# Altium PCB PCB1.PcbDoc
Units mm, origin at the board's own origin, x right, y up, seen from the top; angles counter-clockwise.
Board outline 51.97 x 50 mm, 2 copper layers (Top Layer, Bottom Layer); 61 components, 56 nets, 204 pads, 42 vias.
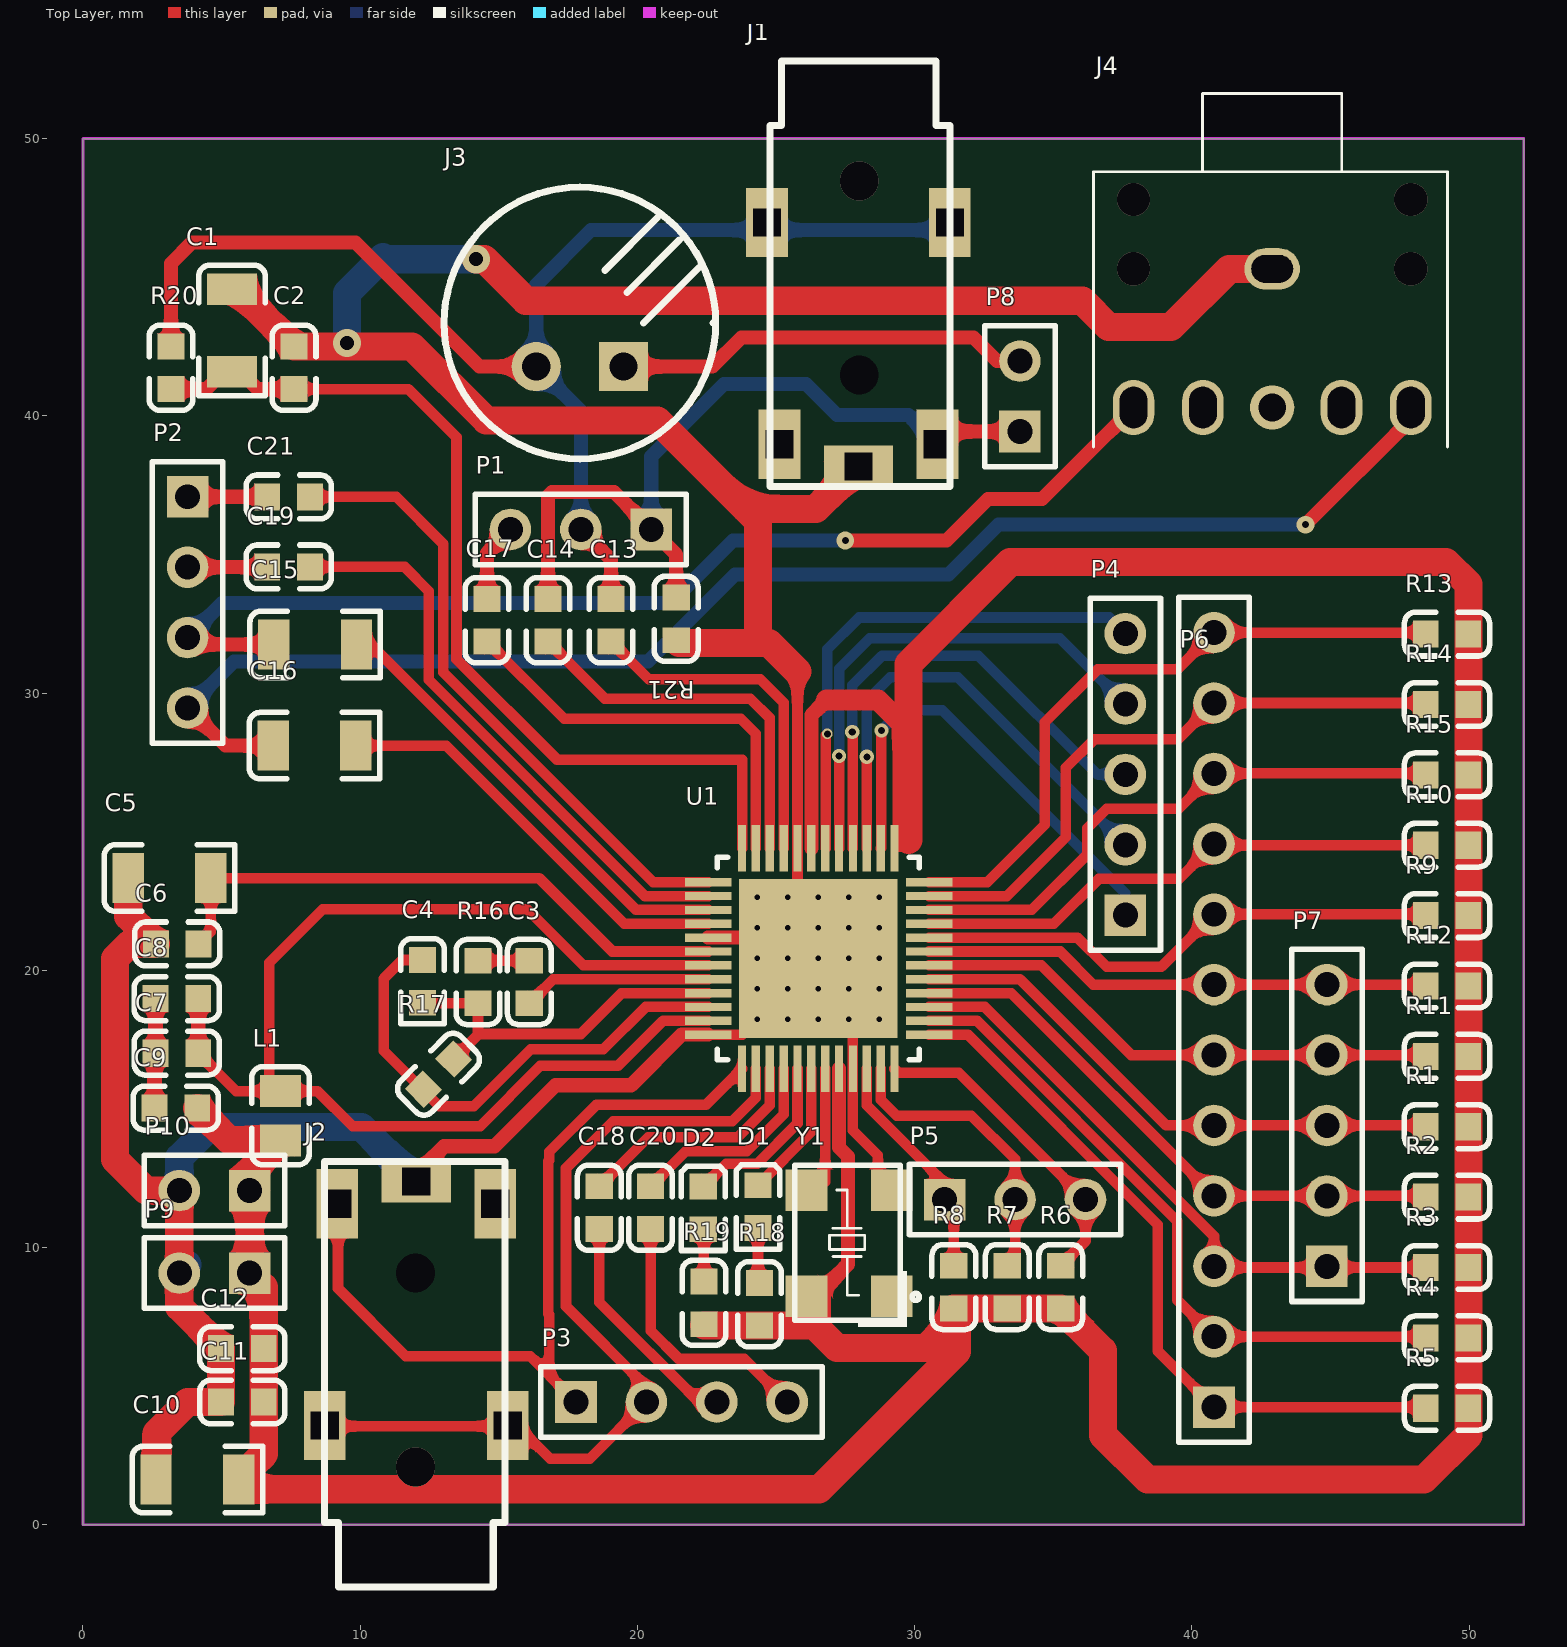
[diagram p0: Top Layer view]
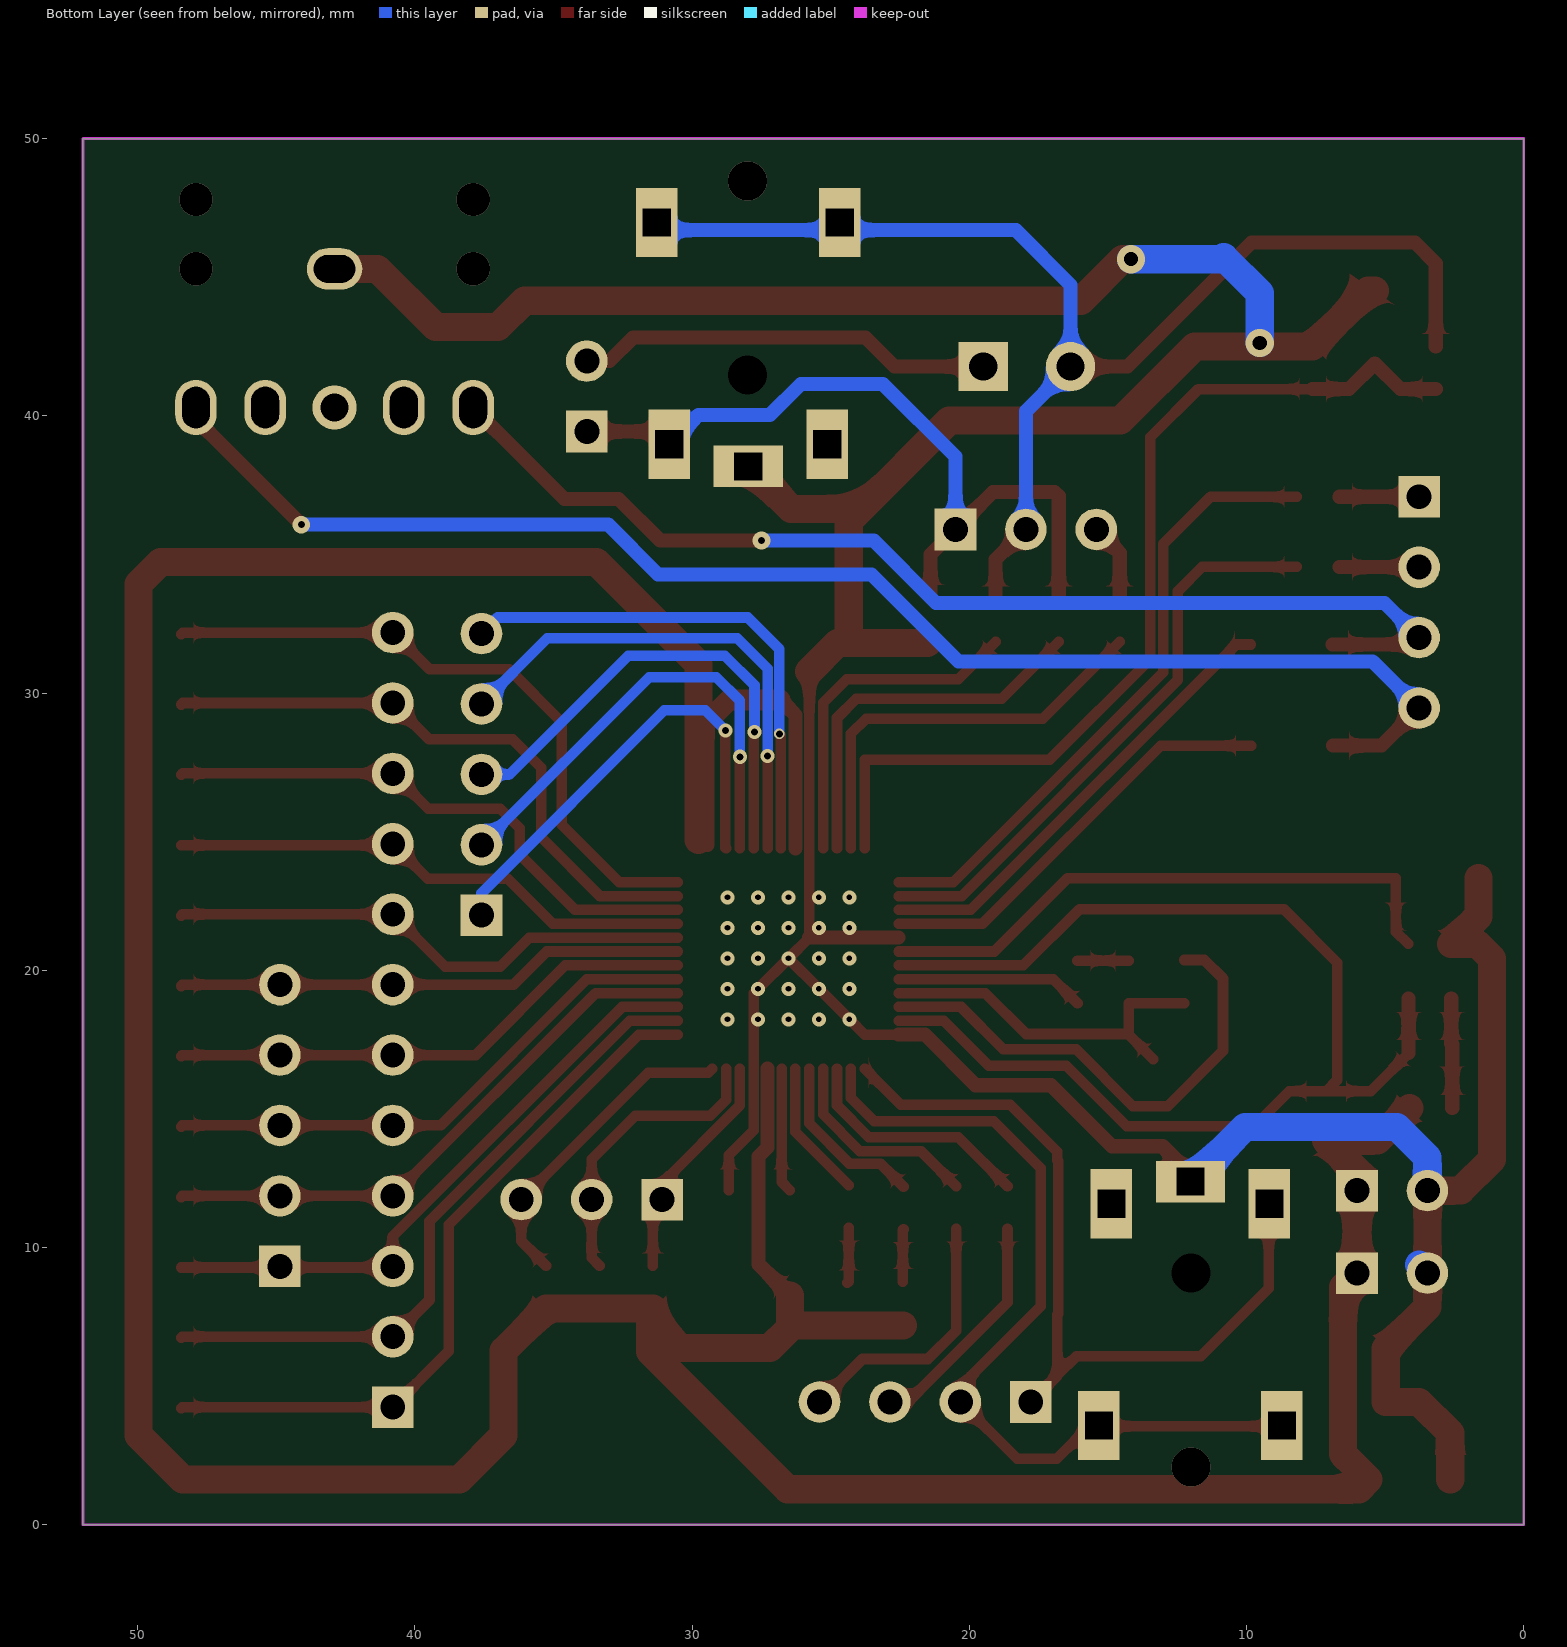
[diagram p1: Bottom Layer view, seen from below]
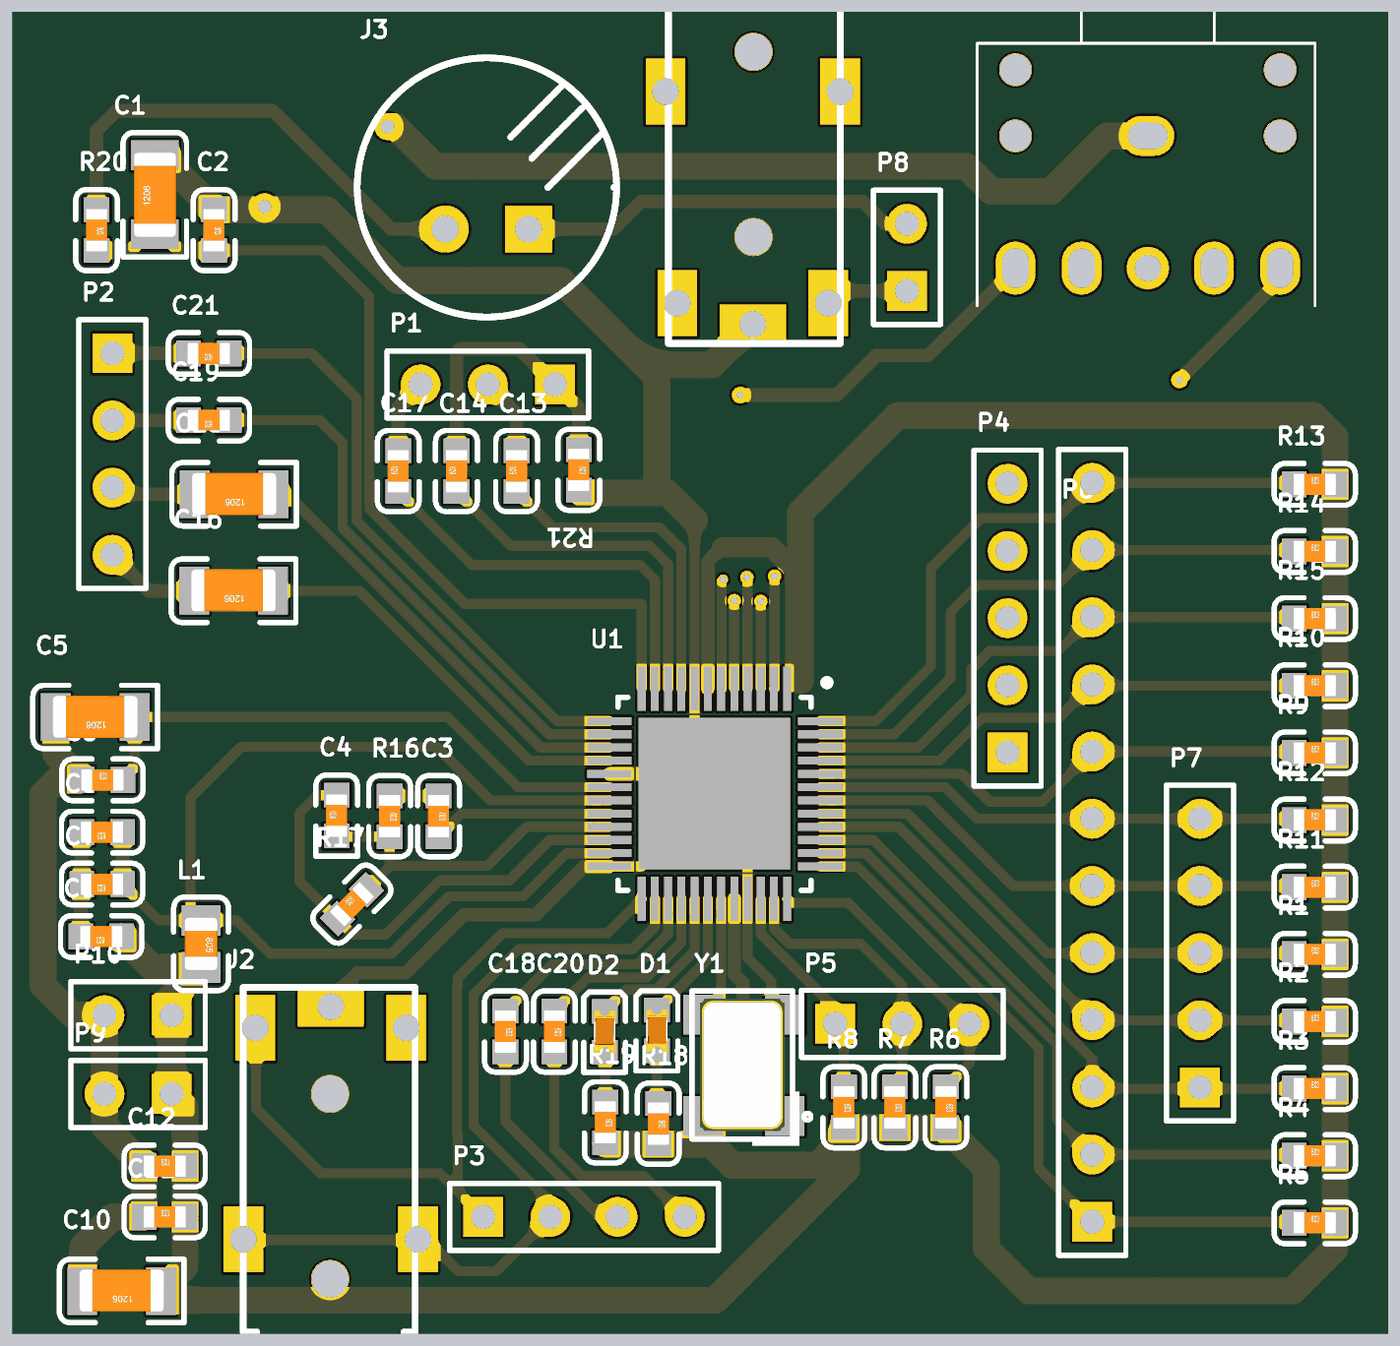
[diagram p2: 3D render of the assembled board from above, using the file's embedded part models]

## Layer stack, top to bottom
Top Solder: solder mask 0.0102, Solder Resist, Dk 3.5
Top Layer: signal copper 0.0356
Dielectric 1: dielectric 0.32, FR-4, Dk 4.8
Bottom Layer: signal copper 0.0356
Bottom Solder: solder mask 0.0102, Solder Resist, Dk 3.5

## Board outline
0,0 0,50 51.975,50 51.975,0

## Design rules (kind name [scope] priority, off if disabled: settings)
Clearance [All] p1 off: gap=0.254 ignorepadtopadclearanceinfootprint=FALSE except(0: Arc-Hole Track-Hole SMDPad-Hole THPad-Hole Via-Hole Fill-Hole Poly-Hole Region-Hole Text-Hole)
PolygonConnect [All] p1: connectstyle=Relief reliefconductorwidth=0.254 reliefentries=4 polygonreliefangle="90 Angle" airgapwidth=0.254
RoutingVias RoutingVias_power [InNetClass('power')] p1: holewidth=0.381 width=0.762 viastyle="Through Hole" minholewidth=0.381 minwidth=0.635 maxholewidth=0.508 maxwidth=1.016
RoutingVias [InNetClass('All Nets')] p2: holewidth=0.254 width=0.508 viastyle="Through Hole" minholewidth=0.254 minwidth=0.508 maxholewidth=0.254 maxwidth=0.635
SolderMaskExpansion [All] p1: expansion=0.102
Width Width_power [InNetClass('power')] p1: maxlimit=1.016 minlimit=0.381 preferedwidth=0.635
Width [All] p2: maxlimit=0.508 minlimit=0.381 preferedwidth=0.381
30 further rules are at their usual default settings.

## Classes and differential pairs
net class power: 3.3V GND

## Components (designator, comment, footprint, x,y, rotation, side; value= is the part's Value field where it differs from the comment)
C1 "Cap Pol1" 1206 5.375,43.075 r90 top value=10uF/16V
C2 "Cap" 0603 7.617,41.735 r270 top value=0.1uF
C3 "Cap" 0603 16.1,19.575 r270 top value=0.1uF
C4 "Cap" 0603 12.25,19.6 r90 top value=220pF
C5 "Cap Pol1" 1206 3.125,23.325 r180 top value=10uF/16V
C6 "Cap" 0603 3.4,20.95 r0 top value=0.1uF
C7 "Cap" 0603 3.386,17.008 r180 top value=0.1uF
C8 "Cap" 0603 3.386,18.975 r180 top value=0.1uF
C9 "Cap" 0603 3.35,15.025 r180 top value=0.1uF
C10 "Cap Pol1" 1206 4.125,1.625 r180 top value=10uF/16V
C11 "Cap" 0603 5.75,4.425 r0 top value=0.1uF
C12 "Cap" 0603 5.75,6.35 r0 top value=0.1uF
C13 "Cap" 0603 19.05,32.625 r90 top value=1uF
C14 "Cap" 0603 16.775,32.625 r90 top value=1uF
C15 "Cap Pol1" 1206 8.375,31.75 r180 top value=10uF/16V
C16 "Cap Pol1" 1206 8.35,28.1 r180 top value=10uF/16V
C17 "Cap" 0603 14.575,32.625 r90 top value=1uF
C18 "Cap" 0603 18.625,11.435 r270 top value=1uF
C19 "Cap" 0603 7.421,34.55 r180 top value=1uF
C20 "Cap" 0603 20.475,11.435 r270 top value=1uF
C21 "Cap" 0603 7.421,37.075 r180 top value=1uF
D1 "LED2" 0603-LED 24.35,11.475 r270 top
D2 "LED2" 0603-LED 22.375,11.425 r270 top
J1 "PJ_322" PJ_322 28,50.475 r270 top
J2 "PJ_322" PJ_322 12,0.075 r90 top
J3 "Mic2" 9*7mic 17.925,43.35 r0 top
J4 "3.5-StereoSocket" 3F07 42.9,40.3 r270 top
L1 "Inductor" 0805 7.125,14.75 r270 top value=47uH
P1 "Header 3" HDR1X3 20.5,35.9 r180 top
P2 "Header 4" HDR1X4 3.775,37.08 r270 top
P3 "Header 4" HDR1X4 17.785,4.425 r0 top
P4 "Header 5" HDR1X5 37.6,21.985 r90 top
P5 "Header 3" HDR1X3 31.085,11.725 r0 top
P6 "Header 12" HDR1X12 40.8,4.24 r90 top
P7 "Header 5" HDR1X5 44.87,9.32 r90 top
P8 "Header 2" HDR1X2 33.8,39.435 r90 top
P9 "Header 2" HDR1X2 6.015,9.075 r180 top
P10 "Header 2" HDR1X2 6.015,12.05 r180 top
R1 "Res1" 0603 49.205,14.355 r0 top value=10K
R2 "Res1" 0603 49.205,11.816 r0 top value=10K
R3 "Res1" 0603 49.205,9.277 r0 top value=10K
R4 "Res1" 0603 49.205,6.739 r0 top value=10K
R5 "Res1" 0603 49.205,4.2 r0 top value=10K
R6 "Res1" 0603 35.271,8.57 r270 top value=10K
R7 "Res1" 0603 33.342,8.57 r270 top value=10K
R8 "Res1" 0603 31.413,8.57 r270 top value=10K
R9 "Res1" 0603 49.205,21.97 r0 top value=10K
R10 "Res1" 0603 49.205,24.509 r0 top value=10K
R11 "Res1" 0603 49.205,16.893 r0 top value=10K
R12 "Res1" 0603 49.205,19.432 r0 top value=10K
R13 "Res1" 0603 49.205,32.125 r0 top value=10K
R14 "Res1" 0603 49.205,29.586 r0 top value=10K
R15 "Res1" 0603 49.205,27.048 r0 top value=10K
R16 "Res1" 0603 14.25,19.575 r270 top value=15K
R17 "Res1" 0603 12.825,16.25 r45 top value=33K
R18 "Res1" 0603 24.402,7.95 r270 top value=1K
R19 "Res1" 0603 22.4,8 r270 top value=1K
R20 "Res1" 0603 3.175,41.735 r270 top value=2K
R21 "Res1" 0603 21.4,32.675 r270 top value=2K
U1 "LD3320" QFN-48P 26.525,20.425 r270 top
Y1 "22.1184MHz" 5*3.2 27.575,10.193 r180 top

## Footprints (in the part's own frame and the unit in brackets; to place one, negate y for a bottom-side part, rotate by r counter-clockwise, add the part's x,y. Pads: shape width x height; smd on the part's side, far side on the other; paste and mask are expansions set on the pad)
3F07 [mm]
  oval 1.5x2 hole 1 slot 1.5 at 90 deg: 1(-5,0)
  oval 2x1.5 hole 1 slot 1.5 at 0 deg: 2(0,5) 3(0,2.5) 4(0,-2.5) 5(0,-5)
  round 1.6 hole 1: ""(0,0)
  silkscreen extent -11.32,-6.45 1.43,6.32
5*3.2 [mm]
  rect 1.5x1.5 smd: 1(-1.6,1.95) 2(-1.6,-1.877) 3(1.475,-1.877) 4(1.475,1.95)
  silkscreen extent -2.59,-2.78 1.9,3.07, body extent -1.6,-2.48 1.6,2.52, height 1
9*7mic [mil]
  rect 70x70 hole 40: 1(62.01,-62.01)
  round 70 hole 40: 2(-62.01,-62.01)
  silkscreen extent -193,-193 193,193
0603 [mm]
  rect 0.93x0.98 smd: 1(-0.77,0) 2(0.77,0)
  silkscreen extent -1.53,-0.79 1.54,0.79, body extent -0.8,-0.4 0.8,0.4, height 0.3
0603-LED [mm]
  rect 0.93x0.98 smd: 1(0.77,0) 2(-0.77,0)
  silkscreen extent -1.5,-0.79 1.53,0.79, body extent -0.8,-0.4 0.8,0.4, height 0.6
0805 [mm]
  rect 1.16x1.47 smd: 1(-0.89,0) 2(0.89,0)
  silkscreen extent -1.77,-1.04 1.77,1.04, body extent -1,-0.62 1,0.63, height 0.77
1206 [mm]
  rect 1.13x1.8 smd: 1(-1.49,0) 2(1.49,0)
  silkscreen extent -2.36,-1.2 2.35,1.2, body extent -1.6,-0.81 1.6,0.79, height 1
HDR1X2 [mm] "Connector; Header; 2 Position"
  rect 1.5x1.5 hole 0.9: 1(0,0)
  round 1.5 hole 0.9: 2(2.54,0)
  silkscreen extent -1.27,-1.27 3.81,1.27
HDR1X3 [mm] "Connector; Header; 3 Position"
  rect 1.5x1.5 hole 0.9: 1(0,0)
  round 1.5 hole 0.9: 2(2.54,0) 3(5.08,0)
  silkscreen extent -1.27,-1.27 6.35,1.27
HDR1X4 [mm] "Connector; Header; 4 Position"
  rect 1.5x1.5 hole 0.9: 1(0,0)
  round 1.5 hole 0.9: 2(2.54,0) 3(5.08,0) 4(7.62,0)
  silkscreen extent -1.27,-1.27 8.89,1.27
HDR1X5 [mm] "Connector; Header; 5 Position"
  rect 1.5x1.5 hole 0.9: 1(0,0)
  round 1.5 hole 0.9: 2(2.54,0) 3(5.08,0) 4(7.62,0) 5(10.16,0)
  silkscreen extent -1.27,-1.27 11.43,1.27
HDR1X12 [mm] "Connector; Header; 12 Position"
  rect 1.5x1.5 hole 0.9: 1(0,0)
  round 1.5 hole 0.9: 2(2.54,0) 3(5.08,0) 4(7.62,0) 5(10.16,0) 6(12.7,0) 7(15.24,0) 8(17.78,0) 9(20.32,0) 10(22.86,0) 11(25.4,0) 12(27.94,0)
  silkscreen extent -1.27,-1.27 29.21,1.27
PJ_322 [mm]
  rect 1.5x2.5 hole 1 square: 1(12.3,-0.025)
  rect 2.5x1.5 hole 1 square: 2(11.5,2.825) 3(3.5,3.275) 3(3.5,-3.325) 4(11.5,-2.875)
  silkscreen extent -2.32,-3.22 13.03,3.28
QFN-48P [mm]
  rect 1.68x0.3 smd: 1(-3.975,2.75) 2(-3.975,2.25) 3(-3.975,1.75) 4(-3.975,1.25) 5(-3.975,0.75) 6(-3.975,0.25) 7(-3.975,-0.25) 8(-3.975,-0.75) 9(-3.975,-1.25) 10(-3.975,-1.75) 11(-3.975,-2.25) 12(-3.975,-2.75) 25(3.975,-2.75) 26(3.975,-2.25) 27(3.975,-1.75) 28(3.975,-1.25) 29(3.975,-0.75) 30(3.975,-0.25) 31(3.975,0.25) 32(3.975,0.75) 33(3.975,1.25) 34(3.975,1.75) 35(3.975,2.25) 36(3.975,2.75)
  round 0.5 on Top Overlay: 3(-4.2,4.25)
  rect 0.3x1.68 smd: 13(-2.75,-3.975) 14(-2.25,-3.975) 15(-1.75,-3.975) 16(-1.25,-3.975) 17(-0.75,-3.975) 18(-0.25,-3.975) 19(0.25,-3.975) 20(0.75,-3.975) 21(1.25,-3.975) 22(1.75,-3.975) 23(2.25,-3.975) 24(2.75,-3.975) 37(2.75,4) 38(2.25,4) 39(1.75,4) 40(1.25,4) 41(0.75,4) 42(0.25,4) 43(-0.25,4) 44(-0.75,4) 45(-1.25,4) 46(-1.75,4) 47(-2.25,4) 48(-2.75,4)
  rect 5.73x5.73 smd: 49(0,0)
  silkscreen extent -3.65,-3.65 3.65,3.65, body extent -3.5,-3.56 3.5,3.44, height 1

## Part data
C1 C5 C10 C15 C16: "Polarized Capacitor (Radial)", LatestRevisionDate=17-Jul-2002, LatestRevisionNote="Re-released for DXP Platform.", PackageDescription="Polarized Capacitor (Radial); 2 Leads", PackageReference=RB7.6-15, Published=8-Jun-2000, Publisher="Altium Limited"
C2 C3 C4 C6 C7 C8 C9 C11 C12 C13 C14 C17 C18 C19 C20 C21: "Capacitor", LatestRevisionDate=17-Jul-2002, LatestRevisionNote="Re-released for DXP Platform.", PackageDescription="Radial Cap, Thru-Hole; 2 Leads; 0.3 in Pin Spacing", PackageReference=RAD-0.3, Published=8-Jun-2000, Publisher="Altium Limited"
D1 D2: "Typical RED, GREEN, YELLOW, AMBER GaAs LED", LatestRevisionDate=17-Jul-2002, LatestRevisionNote="Re-released for DXP Platform.", PackageDescription="SM LED; 2 Flat Leads", PackageReference=3.2X1.6X1.1, PackageVersion=Feb-2002, Published=8-Jun-2000, Publisher="Altium Limited"
J3: "Microphone", LatestRevisionDate=17-Jul-2002, LatestRevisionNote="Re-released for DXP Platform.", PackageReference=PIN2, Published=24-Mar-1999, Publisher="Altium Limited"
J4: "AudioSocket"
P1 P5: "Header, 3-Pin", LatestRevisionDate=17-Jul-2002, LatestRevisionNote="Re-released for DXP Platform.", Publisher="Altium Limited"
P2 P3: "Header, 4-Pin", LatestRevisionDate=17-Jul-2002, LatestRevisionNote="Re-released for DXP Platform.", Publisher="Altium Limited"
P4 P7: "Header, 5-Pin", LatestRevisionDate=17-Jul-2002, LatestRevisionNote="Re-released for DXP Platform.", Publisher="Altium Limited"
P6: "Header, 12-Pin", LatestRevisionDate=17-Jul-2002, LatestRevisionNote="Re-released for DXP Platform.", Publisher="Altium Limited"
P8 P9 P10: "Header, 2-Pin", LatestRevisionDate=17-Jul-2002, LatestRevisionNote="Re-released for DXP Platform.", Publisher="Altium Limited"
R1 R2 R3 R4 R5 R6 R7 R8 R9 R10 R11 R12 R13 R14 R15 R16 R17 R18 R19 R20 R21: "Resistor", LatestRevisionDate=17-Jul-2002, LatestRevisionNote="Re-released for DXP Platform.", PackageDescription="Axial Device, Thru-Hole; 2 Leads; 0.3 in Pin Spacing", PackageReference=AXIAL-0.3, Published=8-Jun-2000, Publisher="Altium Limited"
U1: "SpeechRecognition"
Y1: library part SPXO, "oscillator"
L1: Code_IEC=1005, Code_JEITA=0402, LatestRevisionDate=29-May-2009, LatestRevisionNote="IPC-7351 Footprint Added.", PackageDescription="Chip Inductor", PackageReference=0402-A, Published=8-Jun-2000, Publisher="Altium Limited"

## Via types
v1: diameter 0.5, hole 0.2, Top Layer to Bottom Layer, 25 vias
v2: diameter 0.508, hole 0.254, Top Layer to Bottom Layer, 4 vias
v3: diameter 1.2, hole 1.2, Top Layer to Bottom Layer, 4 vias
v4: diameter 1.25/1.25 (per signal layer), hole 1.4, Top Layer to Bottom Layer, 2 vias
v5: diameter 1.4, hole 1.4, Top Layer to Bottom Layer, 2 vias
v6: diameter 1.016, hole 0.508, Top Layer to Bottom Layer, 2 vias
v7: diameter 0.635, hole 0.254, Top Layer to Bottom Layer, 2 vias
v8: diameter 0.381, hole 0.254, Top Layer to Bottom Layer, 1 vias

## Nets (pads, with @x,y where several pads share a name; then routed paths per layer and width w, separated by ;. In a path a pad name is that pad's centre, name@x,y a point inside that pad or via, vN(x,y) a via of type N, cw(c..) or ccw(c..) an arc to the next point about the centre after c; other vN are vias at no path point)
3.3V: C9.1 C10.1 C11.2 C12.2 L1.2 P9.1 P10.1 R1.2 R2.2 R3.2 R4.2 R5.2 R6.2 R7.2 R8.2 R9.2 R10.2 R11.2 R12.2 R13.2 R14.2 R15.2 R18.2 R19.2 U1.1 U1.7 U1.32 Y1.4 | length 162.1
  Top Layer w0.508: U1.7 26.275,29.2 26.825,29.75 ; Y1.4@26.475,8.27 27.6,9.395 27.6,13.275 27.275,13.6 U1.32 ; 29.45,24.525 29.45,28.975
  Top Layer w0.762: 26.825,29.75 28.675,29.75 29.45,28.975
  Top Layer w1.016: C9.1 5.285,13.86 L1.2 6.015,12.75 P10.1 P9.1 6.52,8.57 C12.2 C11.2 6.52,2.545 5.6,1.625 5.95,1.275 26.55,1.275 31.525,6.25 31.525,7.475 30.425,6.375 27.2,6.375 26.475,7.1 ; R19.2@22.4,7.18 R18.2 26.395,7.18 26.475,7.1 ; Y1.4@26.475,8.27 26.475,7.1 ; 29.775,24.7 29.775,31.05 33.45,34.725 49.175,34.725 49.975,33.925 R13.2 R14.2 R15.2 R10.2 R9.2 R12.2 R11.2 R1.2 R2.2 R3.2 R4.2 R5.2 49.975,3.225 48.375,1.625 38.4,1.625 36.8,3.225 36.8,6.271 R6.2 R7.2 R8.2 R8.2@31.413,7.363
GND: C1.2 C2.1 C5.2 C6.1 C10.2 C11.1 C12.1 J1.1 J2.1 J4.1 P9.2 P10.2 R21.2 U1.8 U1.17 U1.24 U1.33 U1.49 Y1.2 | length 153.5
  Top Layer w0.381: R21.2 R21.2@21.505,31.8 ; U1.24 23.775,17.675 v1(24.325,18.225) v1(25.425,19.325) v1(26.525,20.425) ; 25.775,30.775 U1.8 25.775,21.175 v1(26.525,20.425) ; Y1.2@28.675,12.07 28.675,13.325 27.775,14.225 U1.33 27.775,19.175 v1(27.625,19.325) v1(26.525,20.425)
  Top Layer w0.508: J2.1@12.05,12.675 13.025,13.65 14.85,13.65 17.052,15.851 19.777,15.851 21.6,17.675 U1.24 ; U1.17 U1.49@25.775,21.175
  Top Layer w1.016: C5.2 1.635,21.945 C6.1 1.675,20.95 1.15,20.425 1.15,13.175 2.275,12.05 P10.2 P9.2 3.475,7.855 C12.1 C11.1 3.775,4.425 2.65,3.3 C10.2@2.65,1.625 ; C1.2@5.375,44.51 5.612,44.51 C2.1 11.87,42.505 14.55,39.825 20.725,39.825 23.912,36.638 ; v6(14.175,45.65) 14.475,45.65 15.975,44.15 36.05,44.15 37,43.2 39.25,43.2 41.35,45.3 J4.1 ; R21.2@21.505,31.8 24.75,31.8 25.775,30.775 ; 24.35,31.825 24.35,36.2 23.912,36.638 ; J1.1 26.438,36.638 23.912,36.638
  Bottom Layer w1.016: P9.2 P9.2@3.775,9.375 ; P10.2 3.475,13.25 4.575,14.35 10.05,14.35 J2.1 ; v6(9.525,42.625) 9.525,44.425 10.825,45.725 10.9,45.65 v6(14.175,45.65)
  other v1: 25.425,18.225 26.525,18.225 27.625,18.225 28.725,18.225 24.325,19.325 26.525,19.325 28.725,19.325 24.325,20.425 25.425,20.425 27.625,20.425 28.725,20.425 24.325,21.525 25.425,21.525 26.525,21.525 27.625,21.525 28.725,21.525 24.325,22.625 25.425,22.625 26.525,22.625 27.625,22.625 28.725,22.625
HPOL: C15.2 J4.5 P2.3 | length 40.8
  Top Layer w0.508: P2.3 4.025,31.75 C15.2@6.9,31.75 ; v7(27.5,35.5) 31.15,35.5 32.65,37 34.6,37 J4.5
  Bottom Layer w0.508: P2.3 5.025,33.25 21.2,33.25 23.45,35.5 v7(27.5,35.5)
HPOR: C16.2 J4.2 P2.4 | length 52.5
  Top Layer w0.508: P2.4 5.135,28.1 C16.2@6.875,28.1 ; v7(44.1,36.075) 47.9,39.875 J4.2
  Bottom Layer w0.508: P2.4 5.45,31.135 20.385,31.135 23.525,34.275 31.225,34.275 33.025,36.075 v7(44.1,36.075)
ICR_A0: P6.8 R9.1 U1.44 | length 19.2
  Top Layer w0.381: U1.44 35.875,21.175 36.925,20.125 38.905,20.125 P6.8 48.385,22.02 R9.1
ICR_CLK: U1.31 Y1.3 | length 4.5
  Top Layer w0.381: Y1.3@26.475,12.07 26.775,12.37 U1.31
ICR_CSB: P6.7 P7.5 R12.1 U1.43 | length 18.4
  Top Layer w0.381: U1.43 35.25,20.675 36.445,19.48 P6.7 P7.5 48.387,19.48 R12.1
ICR_HPOL: C15.1 U1.15 | length 16.7
  Top Layer w0.381: C15.1@9.85,31.75 10.375,31.75 19.95,22.175 U1.15
ICR_HPOR: C16.1 U1.16 | length 15.4
  Top Layer w0.381: C16.1@9.825,28.1 13.1,28.1 19.525,21.675 U1.16
ICR_IRQ: P6.12 R13.1 U1.48 | length 23.8
  Top Layer w0.381: U1.48 32.625,23.175 34.7,25.25 34.7,28.95 36.6,30.85 39.47,30.85 P6.12 48.38,32.18 R13.1
ICR_LINL: C21.1 U1.13 | length 22.8
  Top Layer w0.381: C21.1 11.3,37.075 13,35.375 13,30.75 20.575,23.175 U1.13
ICR_LINR: C19.1 U1.14 | length 21.2
  Top Layer w0.381: C19.1 11.6,34.55 12.475,33.675 12.475,30.475 20.275,22.675 U1.14
ICR_LOUTL: C18.1 U1.27 | length 8.7
  Top Layer w0.381: C18.1 20.395,13.975 23.625,13.975 24.775,15.125 U1.27
ICR_LOUTR: C20.1 U1.28 | length 7.5
  Top Layer w0.381: C20.1 21.745,13.475 23.95,13.475 25.275,14.8 U1.28
ICR_MBS: C1.1 C2.2 R20.2 U1.12 | length 34.8
  Top Layer w0.381: C2.2 11.735,40.965 13.475,39.225 13.475,31.225 17.1,27.6 23.775,27.6 U1.12
  Top Layer w0.508: R20.2 4.45,40.965 5.375,41.89 6.3,40.965 C2.2
ICR_MICN: C14.1 U1.10 | length 13.8
  Top Layer w0.381: C14.1 18.83,29.8 24.075,29.8 24.775,29.1 U1.10
ICR_MICP: C13.1 U1.9 | length 12.4
  Top Layer w0.381: C13.1 20.405,30.5 24.425,30.5 25.275,29.65 U1.9
ICR_MODE: P6.10 R15.1 U1.46 | length 20.5
  Top Layer w0.381: U1.46 34.225,22.175 36.225,24.175 36.225,25.125 36.925,25.825 39.525,25.825 P6.10 48.383,27.1 R15.1
ICR_MONO: C17.1 U1.11 | length 15.2
  Top Layer w0.381: C17.1 17.355,29.075 23.725,29.075 24.275,28.525 U1.11
ICR_P0: P6.5 P7.3 R1.1 U1.41 | length 20.1
  Top Layer w0.381: U1.41 33.8,19.675 39.075,14.4 P6.5 P7.3 48.39,14.4 R1.1
ICR_P1: P6.4 P7.2 R2.1 U1.40 | length 21
  Top Layer w0.381: U1.40 33.485,19.175 P6.4 P7.2 48.391,11.86 R2.1
ICR_P2: P6.3 P7.1 R3.1 U1.39 | length 22.4
  Top Layer w0.381: U1.39 32.525,18.675 40.8,10.4 P6.3 40.843,9.277 R3.1
ICR_P3: P6.2 R4.1 U1.38 | length 24.3
  Top Layer w0.381: U1.38 32.25,18.175 39.475,10.95 39.475,8.105 P6.2 48.394,6.78 R4.1
ICR_P4: P6.1 R5.1 U1.37 | length 26.2
  Top Layer w0.381: U1.37 31.925,17.675 38.775,10.825 38.775,6.265 P6.1 48.395,4.24 R5.1
ICR_P5: P5.3 R6.1 U1.36 | length 11.6
  Top Layer w0.381: U1.36 29.425,16.3 31.59,16.3 P5.3 36.165,10.234 R6.1
ICR_P6: P5.2 R7.1 U1.35 | length 10.8
  Top Layer w0.381: U1.35 28.775,15.325 29.35,14.75 32.05,14.75 33.625,13.175 P5.2 33.625,9.623 R7.1
ICR_P7: P5.1 R8.1 U1.34 | length 8.4
  Top Layer w0.381: U1.34 28.275,15.125 31.085,12.315 P5.1 31.413,11.397 R8.1
ICR_RDB: P6.9 R10.1 U1.45 | length 19.1
  Top Layer w0.381: U1.45 35.025,21.675 36.65,23.3 39.54,23.3 P6.9 40.851,24.509 R10.1
ICR_RST: P6.11 R14.1 U1.47 | length 22.3
  Top Layer w0.381: U1.47 33.325,22.675 35.45,24.8 35.45,27.3 36.475,28.325 39.485,28.325 P6.11 48.381,29.64 R14.1
ICR_SPON: J2.2 P3.1 U1.25 | length 29.9
  Top Layer w0.381: J2.2@9.2,11.875 9.2,8.525 11.65,6.075 16.135,6.075 16.825,5.385 ; P3.1 16.825,5.385 ; U1.25 22.475,15.15 18.525,15.15 16.825,13.45 16.825,13.148 16.79,13.113 16.79,7.612 16.825,7.577 16.825,5.385
ICR_SPOP: J2.3 P3.2 U1.26 | length 31.6
  Top Layer w0.381: J2.3@8.75,3.875 9.075,3.55 15.675,3.55 16.85,2.375 18.275,2.375 P3.2 20.325,4.975 17.425,7.875 17.425,12.85 19.125,14.55 23.425,14.55 24.275,15.4 U1.26
ICR_Test2: P4.1 U1.2 | length 16.9
  Top Layer w0.381: U1.2 28.8,24.425 v2(28.8,28.65)
  Bottom Layer w0.381: v2(28.8,28.65) 29.525,29.375 31,29.375 37.6,22.775 P4.1
ICR_Test3: P4.2 U1.3@28.275,24.4 | length 17.5
  Top Layer w0.381: U1.3@28.275,24.4 v2(28.275,27.7)
  Bottom Layer w0.381: v2(28.275,27.7) 28.275,29.725 29.125,30.575 31.55,30.575 P4.2
ICR_Test4: P4.3 U1.4 | length 18
  Top Layer w0.381: v2(27.75,28.6) 27.775,28.575 U1.4
  Bottom Layer w0.381: v2(27.75,28.6) 27.75,30.275 28.825,31.35 32.3,31.35 36.585,27.065 P4.3
ICR_Test5: P4.4 U1.5 | length 18.3
  Top Layer w0.381: U1.5 v2(27.275,27.725)
  Bottom Layer w0.381: v2@27.3,27.75 v2(27.275,27.725) 27.275,30.875 28.375,31.975 35.23,31.975 P4.4
ICR_Test6: P4.5 U1.6 | length 18.6
  Top Layer w0.381: U1.6@26.8,24.4 v8@26.8,28.475
  Bottom Layer w0.381: v8(26.85,28.525) 26.85,31.575 28,32.725 37.02,32.725 P4.5
ICR_Test29: D2.2 U1.29 | length 6.3
  Top Layer w0.381: D2.2 23.205,13.025 24.325,13.025 25.775,14.475 U1.29
ICR_Test30: D1.2 U1.30 | length 5
  Top Layer w0.381: D1.2 26.275,14.17 U1.30
ICR_WRB: P6.6 P7.4 R11.1 U1.42 | length 19.3
  Top Layer w0.381: U1.42 34.575,20.175 37.81,16.94 P6.6 P7.4 48.388,16.94 R11.1
LINL: C21.2 P2.1 | length 2.9
  Top Layer w0.508: P2.1 6.646,37.08 C21.2
LINR: C19.2 P2.2 | length 2.9
  Top Layer w0.508: P2.2 6.641,34.54 C19.2
LOUTL: C18.2 P3.3 | length 8.4
  Top Layer w0.381: C18.2 18.625,8.025 22.225,4.425 P3.3
LOUTR: C20.2 P3.4 | length 9.7
  Top Layer w0.381: C20.2 20.475,7 21.5,5.975 23.855,5.975 P3.4
MICN: C14.2 J1.2 P1.1 P8.1 R21.1 | length 28.3
  Top Layer w0.508: C14.2 16.775,37.1 16.925,37.25 19.15,37.25 P1.1 21.4,35 R21.1 ; J1.2@31.285,39.435 P8.1
  Bottom Layer w0.508: P1.1 20.5,38.525 23.125,41.15 26.075,41.15 27.2,40.025 29.775,40.025 J1.2
MICP: C13.2 J1.3 J3.2 P1.2 R20.1 | length 47.1
  Top Layer w0.508: R20.1 3.175,45.5 3.925,46.25 9.825,46.25 14.3,41.775 J3.2 J3.2@16.35,42.25 ; P1.2 19.05,34.81 C13.2
  Bottom Layer w0.508: P1.2 17.96,40.165 J3.2 16.35,44.725 18.325,46.7 24.8,46.7 J1.3@31.4,46.7
MONO: C17.2 P1.3 | length 2.8
  Top Layer w0.508: C17.2@14.575,33.445 14.575,35.055 P1.3
NetC3_1: C3.1 R16.1 | length 1.9
  Top Layer w0.381: R16.1 C3.1
NetC3_2: C3.2 U1.20 | length 6.8
  Top Layer w0.381: C3.2 16.97,19.675 U1.20
NetC4_1: C4.1 R16.2 R17.2 U1.21 | length 13.3
  Top Layer w0.381: C4.1@12.25,18.805 R16.2 14.25,17.675 ; R17.2 14.25,17.675 ; U1.21 19.425,19.175 17.95,17.7 14.275,17.7 14.25,17.675
NetC4_2: C4.2 R17.1 U1.22 | length 18.3
  Top Layer w0.381: C4.2 11.52,20.37 10.85,19.7 10.85,17.1 12.85,15.1 14.1,15.1 16.15,17.15 18.775,17.15 20.3,18.675 U1.22
NetC5_1: C5.1 C6.2 U1.18 | length 21.6
  Top Layer w0.381: C6.2 4.615,21.395 C5.1 16.45,23.325 19.1,20.675 U1.18
NetC7_1: C7.1 C8.1 L1.1 U1.19 U1.23 | length 45.3
  Top Layer w0.381: C7.1 5.524,15.64 L1.1 ; U1.23 20.925,18.175 19.3,16.55 16.5,16.55 14.325,14.375 9.725,14.375 8.46,15.64 L1.1 ; U1.19 18.05,20.175 16.025,22.2 8.65,22.2 6.725,20.275 6.725,16.04 L1.1
  Top Layer w0.508: C7.1 C8.1
NetC7_2: C7.2 C8.2 C9.2 | length 4
  Top Layer w0.508: C9.2 2.58,17.314 2.616,17.35 C8.2
NetD1_1: D1.1 R18.1 | length 2
  Top Layer w0.381: D1.1 24.35,8.772 R18.1
NetD2_1: D2.1 R19.1 | length 1.9
  Top Layer w0.381: D2.1 22.4,10.63 R19.1
NetJ3_1: J3.1 P8.2 | length 15.1
  Top Layer w0.508: J3.1 22.7,41.775 23.75,42.825 32.125,42.825 32.975,41.975 P8.2
pads on no net: J1.4 J2.4 J4. J4.3 J4.4 U1.3@30.775,24.625 Y1.1
copper on no net:
  other v3: 37.9,45.3 47.9,45.3 37.9,47.8 47.9,47.8
  other v4: 12,9.075 28,41.475
  other v5: 12,2.075 28,48.475

## Keep-outs
Keep-Out Layer:
  the board outline again, w0.1